# EAGLE board LayoutPCB (EAGLE 9.6.2)
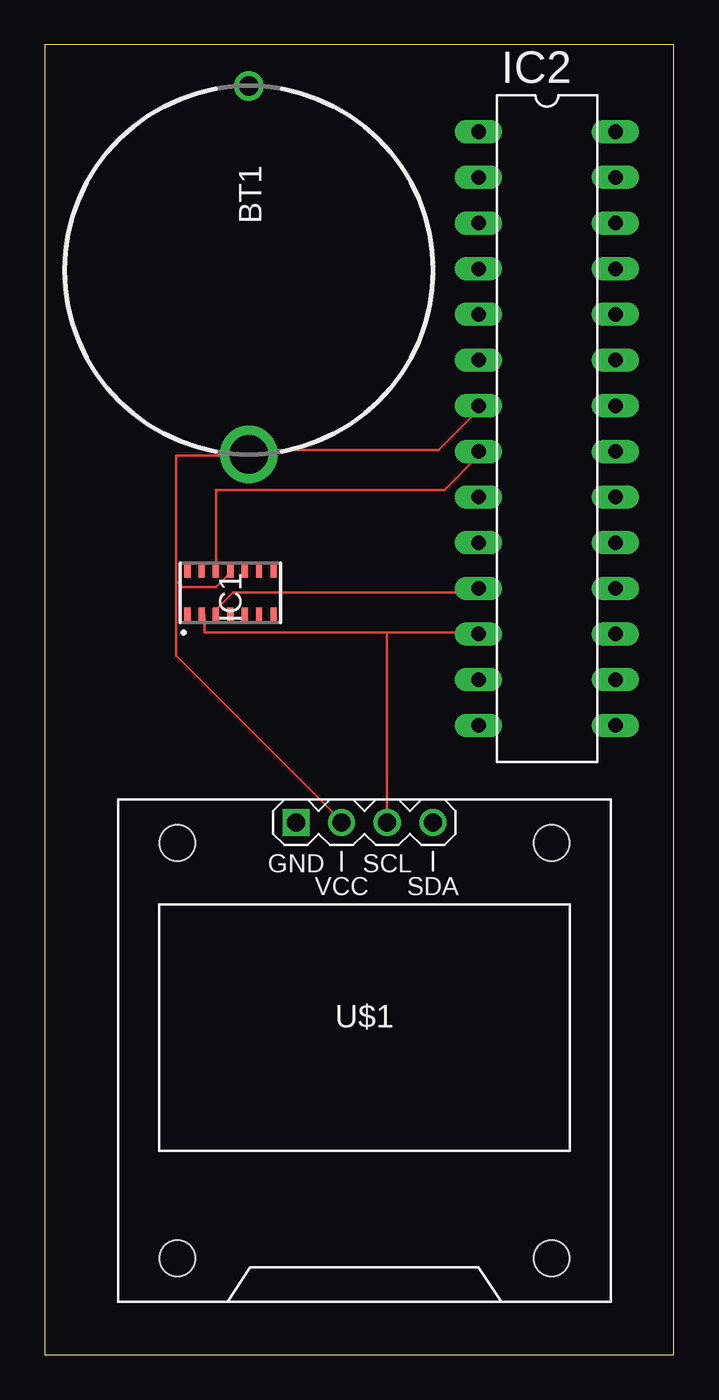
[diagram p0: board, top side]
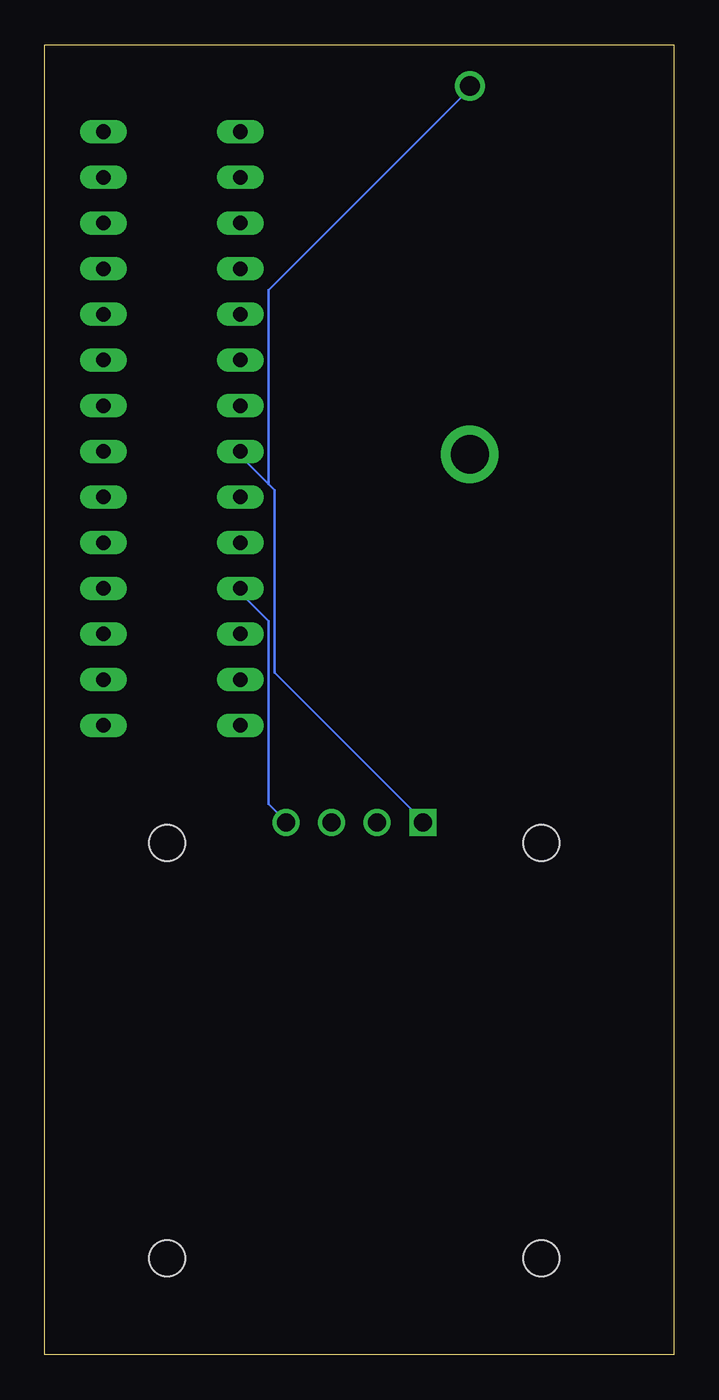
[diagram p1: board, bottom side, seen from below]

Size 35 x 72.86 mm. Coordinates in mm from the lower left corner, seen from the top.
Outline: 0,0 35,0 35,72.86 0,72.86 0,0
Copper layers (1*16): Top 0.035mm / dielectric 1.5mm / Bottom 0.035mm
Design rules "default": minimum track width 6mil, minimum drill 0.35mm, track to track 6mil, track to pad 6mil, pad to pad 6mil, via to via 6mil, smd to smd 6mil, copper to edge 40mil, drill to drill 6mil, minimum pad ring 10mil, minimum via ring 8mil, stop-mask expansion 4mil, vias tented up to drill 0mil, thermal gap 10mil

## Footprints (pad centres in the part's own frame; a part is rotated, then mirrored left to right if it is on the bottom)
CR-2032HFN = drill 1.09 pad 1.65: 1 -10.25,0 | drill 2.12 pad 3.2: 2 10.25,0
14-LEAD-OESIP = smd 0.75 x 0.35: 1 -1.2,2.4; 2 -1.2,1.6; 3 -1.2,0.8; 4 -1.2,0; 5 -1.2,-0.8; 6 -1.2,-1.6; 7 -1.2,-2.4; 8 1.2,-2.4; 9 1.2,-1.6; 10 1.2,-0.8; 11 1.2,0; 12 1.2,0.8; 13 1.2,1.6; 14 1.2,2.4
DIL28-3 = drill 0.813 long: 1 -16.51,-3.81; 2 -13.97,-3.81; 3 -11.43,-3.81; 4 -8.89,-3.81; 5 -6.35,-3.81; 6 -3.81,-3.81; 7 -1.27,-3.81; 8 1.27,-3.81; 9 3.81,-3.81; 10 6.35,-3.81; 11 8.89,-3.81; 12 11.43,-3.81; 13 13.97,-3.81; 14 16.51,-3.81; 15 16.51,3.81; 16 13.97,3.81; 17 11.43,3.81; 18 8.89,3.81; 19 6.35,3.81; 20 3.81,3.81; 21 1.27,3.81; 22 -1.27,3.81; 23 -3.81,3.81; 24 -6.35,3.81; 25 -8.89,3.81; 26 -11.43,3.81; 27 -13.97,3.81; 28 -16.51,3.81
DISPLAY-OLED-128X64-I2C = drill 1 square: 1 -3.81,12.7 | drill 1: 2 -1.27,12.7; 3 1.27,12.7; 4 3.81,12.7 | hole 2: -10.414,11.557; 10.414,11.557; 10.414,-11.557; -10.414,-11.557

## Placement (x,y rotation side)
BT1  CR-2032_HFN  [CR-2032HFN]  11.35,60.33 270 top
IC1  MAX30102EFD+  [14-LEAD-OESIP]  10.32,42.39 90 top
IC2  MEGA8-P  [DIL28-3]  27.94,51.52 270 top
U$1  DISPLAY-OLED-128X64-I2C  [DISPLAY-OLED-128X64-I2C]  17.78,16.91 0 top

## Library data of the parts
BT1 = CR-2032_HFN; ARROW_PART_NUMBER: CR-2032/HFN; ARROW_PRICE-STOCK: https://www.arrow.com/en/products/cr-2032hfn/panasonic; DESCRIPTION: CR2032/1HF Non rechargeable Li coin cell Panasonic CR2032 3V Lithium Manganese Dioxide Coin Button Battery; HEIGHT: mm; MANUFACTURER_NAME: Panasonic; MANUFACTURER_PART_NUMBER: CR-2032/HFN; MOUSER_PART_NUMBER: 658-CR-2032/HFN; MOUSER_PRICE-STOCK: https://www.mouser.co.uk/ProductDetail/Panasonic-Battery/CR-2032-HFN?qs=w3%252Bcv6FlocpXdsVF%252BYgeww%3D%3D
IC1 = MAX30102EFD+; DESCRIPTION: MAXIM INTEGRATED PRODUCTS - MAX30102EFD+ - PULSE OXIMETER/HEART RATE SENSOR, OESIP; HEIGHT: mm; MANUFACTURER_NAME: Maxim Integrated; MANUFACTURER_PART_NUMBER: MAX30102EFD+; MOUSER_PART_NUMBER: 700-MAX30102EFD+; MOUSER_PRICE-STOCK: https://www.mouser.co.uk/ProductDetail/Maxim-Integrated/MAX30102EFD%2b?qs=nVS1qgv%252BQrk9UYEvS27V%2Fg%3D%3D
IC2 = atmel; OC_FARNELL: unknown; OC_NEWARK: unknown
U$1 = diy-modules

## Nets
AVCC: IC2.20
GND: IC2.22
N$1: IC1.2 IC2.12 U$1.3
N$2: IC1.3 IC2.11 U$1.4
N$3: BT1.2 IC1.11 IC2.7 U$1.2
N$4: BT1.1 IC1.12 IC2.8 U$1.1

## Tracks (layer width: path | path; a pad name or v marks a point on that pad's centre or on a via)
N$1
  Top 0.152: 19.05,40.17 24.13,40.17 IC2.12 | 19.05,40.17 8.89,40.17 8.89,41.12 IC1.2 | 19.05,40.17 U$1.3
N$2
  Top 0.152: IC1.3 9.53,41.44 10.48,42.39 24.13,42.39 IC2.11
  Bottom 0.152: U$1.4 21.59,29.69 22.54,30.64 22.54,40.8 24.13,42.39 IC2.11
N$3
  Top 0.152: 7.3,43.03 7.62,42.71 9.53,42.71 10.16,43.34 IC1.11 | 7.3,43.03 7.3,50.01 11.11,50.01 BT1.2 11.43,50.33 21.91,50.33 24.13,52.55 IC2.7 | 7.3,43.03 7.3,38.9 16.51,29.69 U$1.2
N$4
  Top 0.152: IC1.12 9.53,43.66 9.53,48.11 22.23,48.11 24.13,50.01 IC2.8
  Bottom 0.152: 22.54,48.42 24.13,50.01 IC2.8 | 22.54,48.42 22.23,48.11 22.23,37.95 13.97,29.69 U$1.1 | 22.54,48.42 22.54,59.22 11.43,70.33 BT1.1